# EAGLE board rcp2n64rgb (EAGLE 9.5.2)
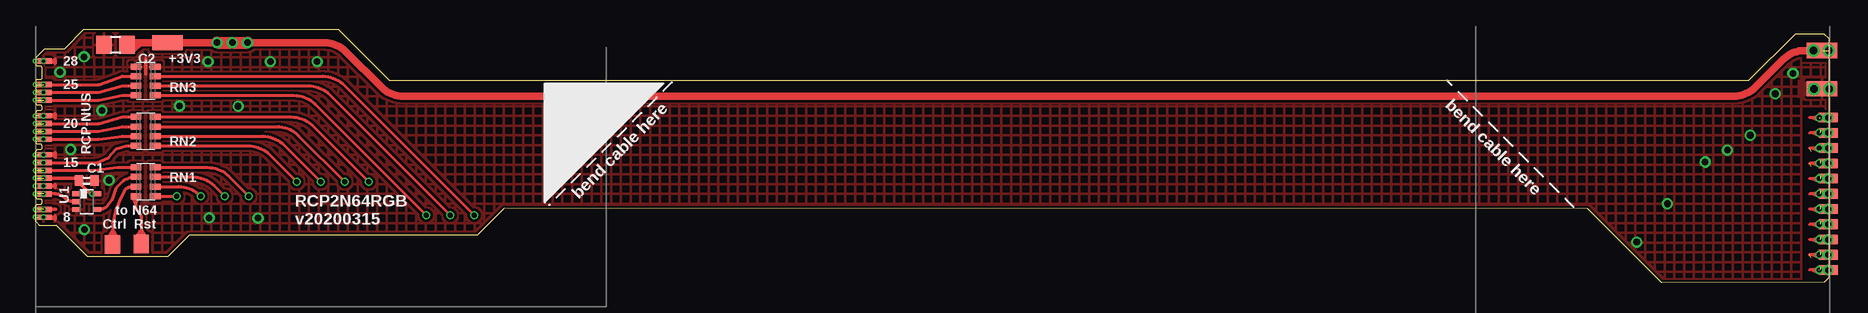
[diagram p0: board, top side]
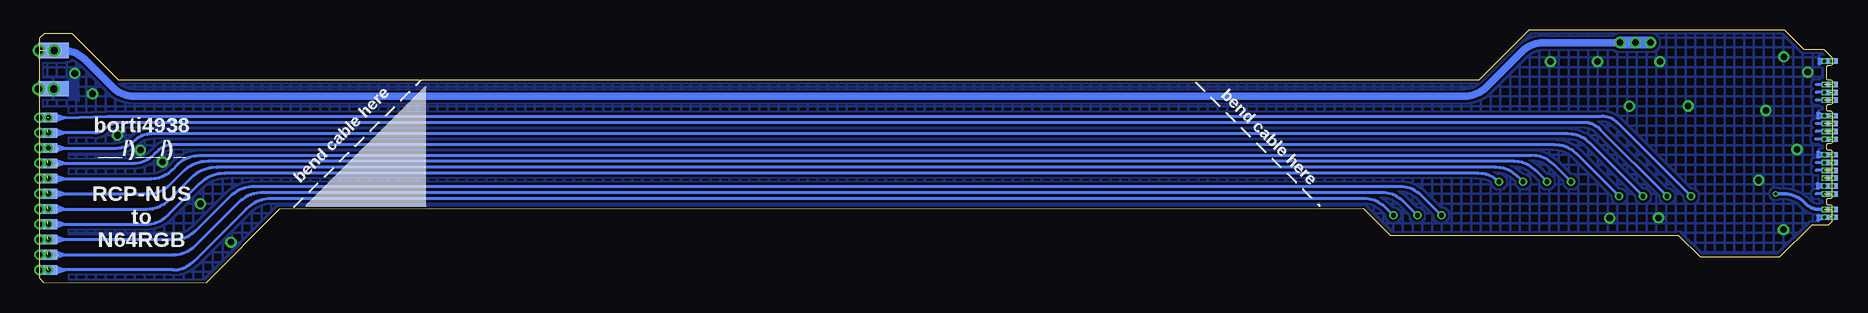
[diagram p1: board, bottom side, seen from below]

Size 149.4 x 21.05 mm. Coordinates in mm from the lower left corner, seen from the top.
Outline: 0,5.1 0.3,4.8 1.7,4.8 4.35,2.15 11,2.15 12.8,3.95 36.8,3.95 39.05,6.2 129.35,6.15 135.5,0 149.05,0.05 149.4,0.4 149.4,20.35 149,20.75 146.66,20.75 142.76,16.85 29.45,16.85 25.25,21.05 3.98,21.05 2.38,19.45 0.7,19.45 0,18.75 0,18.15 0.1,18.05 0.4,18.05 0.5,17.95 0.5,17 0.4,16.9 0.1,16.9 0,16.8 0,14.9 0.1,14.8 0.4,14.8 0.5,14.7 0.5,14.4 0.4,14.3 0.1,14.3 0,14.2 0,11.65 0.1,11.55 0.4,11.55 0.5,11.45 0.5,11.15 0.4,11.05 0.1,11.05 0,10.95 0,7.1 0.1,7 0.4,7 0.5,6.9 0.5,6.6 0.4,6.5 0.1,6.5 0,6.4 0,5.1
Copper layers (1*16): Top 0.018mm / dielectric 1.55mm / Bottom 0.018mm
Design rules "fpc": minimum track width 0.1mm, minimum drill 0.2mm, track to track 0.2mm, track to pad 0.2mm, pad to pad 0.2mm, via to via 0.2mm, smd to smd 0mil, copper to edge 0.2mm, drill to drill 0.2mm, minimum pad ring 0.125mm, minimum via ring 0.1mm, stop-mask expansion 2mil, vias tented up to drill 1mm, thermal gap 0.2mm
bKeepout: area 147.3,-0.6 to 149,14.5
tRestrict: area 147.3,18.4 to 150.1,20.7; area 147.3,-0.6 to 149,14.5
bRestrict: area 147.1,-0.6 to 149,14.5; area 147.3,18.4 to 150.1,20.7

## Footprints (pad centres in the part's own frame; a part is rotated, then mirrored left to right if it is on the bottom)
SMD0,8-1,6 = smd 0.8 x 1.6: P$1 0,0
C0402 = smd 0.7 x 0.9: 1 -0.65,0; 2 0.65,0
C0805 = smd 1.3 x 1.5: 1 -0.95,0; 2 0.95,0
SMD0,45-1,35 = smd 1.35 x 0.45: P$1 0,0
SMD0.8SQ = smd 1.27 x 1.524: P$1 0,0
SMD1,27-2,54 = smd 1.27 x 2.54: 1 0,0
CTS742C083 = smd 0.5 x 0.9: 1 -1.2,-0.8; 2 -0.4,-0.8; 3 0.4,-0.8; 4 1.2,-0.8; 5 1.2,0.8; 6 0.4,0.8; 7 -0.4,0.8; 8 -1.2,0.8
DCK_R-PDSO-G5 = smd 0.4 x 0.7: 1 -0.65,-0.85; 2 0,-0.85; 3 0.65,-0.85; 4 0.65,0.85; 5 -0.65,0.85

## Placement (x,y rotation side)
/RST_A  [SMD0,8-1,6]  148.72,13.75 270 bottom
/RST_A1  [SMD0,8-1,6]  149.37,13.75 270 top
C1  [C0402]  4.25,8.5 0 top
C2  22u  [C0805]  6.65,19.8 180 top
CLOCK#  [SMD0,8-1,6]  148.72,11.21 270 bottom
CLOCK#1  [SMD0,8-1,6]  149.37,11.21 270 top
CTRL_A  [SMD0,8-1,6]  148.72,12.48 270 bottom
CTRL_A1  [SMD0,8-1,6]  149.37,12.48 270 top
D0  [SMD0,8-1,6]  148.72,1.05 270 bottom
D1  [SMD0,8-1,6]  148.72,2.32 270 bottom
D2  [SMD0,8-1,6]  148.72,3.59 270 bottom
D3  [SMD0,8-1,6]  148.72,4.86 270 bottom
D4  [SMD0,8-1,6]  148.72,6.13 270 bottom
D5  [SMD0,8-1,6]  148.72,7.4 270 bottom
D6  [SMD0,8-1,6]  148.72,8.67 270 bottom
D7  [SMD0,8-1,6]  149.37,1.05 270 top
D8  [SMD0,8-1,6]  149.37,2.32 270 top
D9  [SMD0,8-1,6]  149.37,3.59 270 top
D10  [SMD0,8-1,6]  149.37,4.86 270 top
D11  [SMD0,8-1,6]  149.37,6.13 270 top
D12  [SMD0,8-1,6]  149.37,7.4 270 top
D13  [SMD0,8-1,6]  149.37,8.67 270 top
DSYNC#  [SMD0,8-1,6]  148.72,9.94 270 bottom
DSYNC#1  [SMD0,8-1,6]  149.37,9.94 270 top
E$1  [SMD0,45-1,35]  0.65,6.1 0 top
E$2  [SMD0.8SQ]  6.4,3.18 0 top
E$3  [SMD0,45-1,35]  0.2,6.1 0 bottom
E$4  [SMD0,45-1,35]  0.2,8.7 0 bottom
E$5  [SMD0,45-1,35]  0.65,8.7 0 top
E$6  [SMD0.8SQ]  8.8,3.23 0 top
E$8  [SMD0,45-1,35]  0.65,7.4 0 top
E$9  [SMD0,45-1,35]  0.65,8.05 0 top
E$10  [SMD0,45-1,35]  0.65,9.35 0 top
E$11  [SMD0,45-1,35]  0.65,10 0 top
E$12  [SMD0,45-1,35]  0.65,10.65 0 top
E$13  [SMD0,45-1,35]  0.65,11.95 0 top
E$14  [SMD0,45-1,35]  0.65,12.6 0 top
E$15  [SMD0,45-1,35]  0.65,13.25 0 top
E$16  [SMD0,45-1,35]  0.65,13.9 0 top
E$17  [SMD0,45-1,35]  0.65,15.2 0 top
E$18  [SMD0,45-1,35]  0.65,15.85 0 top
E$19  [SMD0,45-1,35]  0.65,16.5 0 top
E$22  [SMD0,45-1,35]  0.2,16.5 0 bottom
E$23  [SMD0,45-1,35]  0.2,15.85 0 bottom
E$24  [SMD0,45-1,35]  0.2,15.2 0 bottom
E$25  [SMD0,45-1,35]  0.2,13.9 0 bottom
E$26  [SMD0,45-1,35]  0.2,13.25 0 bottom
E$27  [SMD0,45-1,35]  0.2,12.6 0 bottom
E$28  [SMD0,45-1,35]  0.2,11.95 0 bottom
E$29  [SMD0,45-1,35]  0.2,10.65 0 bottom
E$30  [SMD0,45-1,35]  0.2,10 0 bottom
E$31  [SMD0,45-1,35]  0.2,9.35 0 bottom
E$32  [SMD0,45-1,35]  0.2,8.05 0 bottom
E$33  [SMD0,45-1,35]  0.2,7.4 0 bottom
E$43  [SMD0,45-1,35]  0.2,5.45 0 bottom
E$46  [SMD0,45-1,35]  0.65,18.45 0 top
E$47  [SMD0,45-1,35]  0.2,18.45 0 bottom
GND  [SMD0,45-1,35]  0.65,5.45 0 top
P_GND0  [SMD1,27-2,54]  148.21,16.16 90 bottom
P_GND1  [SMD1,27-2,54]  148.86,16.16 90 top
P_VCC_3V  [SMD1,27-2,54]  148.21,19.34 90 bottom
P_VCC_3V1  [SMD1,27-2,54]  148.86,19.34 90 top
P_VCC_3V3  [SMD1,27-2,54]  10.96,19.99 90 top
RN1  [CTS742C083]  9.15,8.4 270 top
RN2  [CTS742C083]  9.15,12.6 270 top
RN3  [CTS742C083]  9.15,16.8 270 top
U1  [DCK_R-PDSO-G5]  4.25,6.75 270 top

## Library data of the parts
/RST_A /RST_A1 CLOCK# CLOCK#1 CTRL_A CTRL_A1 D0 D1-D13 DSYNC# DSYNC#1 E$1-E$6 E$8-E$19 E$22-E$33 E$43 E$46 E$47 GND = wirepad
C1 C2 = rcl
P_GND0 P_GND1 P_VCC_3V P_VCC_3V1 P_VCC_3V3 = wirepad@1
RN1-RN3 = resistor-net
U1 = 74xx-little-de

## Nets
3V3: C2.1 P_VCC_3V1.1 P_VCC_3V3.1 P_VCC_3V.1
#DSYNC: E$10.P$1 E$31.P$1 RN1.1
#DSYNC.1: DSYNC#1.P$1 DSYNC#.P$1 RN1.8
CTRL: E$2.P$1 RN1.3
CTRL.1: CTRL_A1.P$1 CTRL_A.P$1 RN1.6
D0: E$19.P$1 E$22.P$1 RN3.2
D0.1: D0.P$1 D7.P$1 RN3.7
D1: E$18.P$1 E$23.P$1 RN3.3
D1.1: D1.P$1 D8.P$1 RN3.6
D2: E$17.P$1 E$24.P$1 RN3.4
D2.1: D2.P$1 D9.P$1 RN3.5
D3: E$15.P$1 E$26.P$1 RN2.1
D3.1: D3.P$1 D10.P$1 RN2.8
D4: E$14.P$1 E$27.P$1 RN2.2
D4.1: D4.P$1 D11.P$1 RN2.7
D5: E$13.P$1 E$28.P$1 RN2.3
D5.1: D5.P$1 D12.P$1 RN2.6
D6: E$11.P$1 E$30.P$1 RN2.4
D6.1: D6.P$1 D13.P$1 RN2.5
GND: C1.2 C2.2 E$9.P$1 E$12.P$1 E$16.P$1 E$25.P$1 E$29.P$1 E$32.P$1 E$43.P$1 E$46.P$1 GND.P$1 P_GND0.1 P_GND1.1 RN3.1 RN3.8 U1.3
RST: E$6.P$1 RN1.4
RST.1: /RST_A1.P$1 /RST_A.P$1 RN1.5
VCC: C1.1 E$1.P$1 E$3.P$1 E$4.P$1 E$5.P$1 U1.5
VCLK: E$8.P$1 E$33.P$1 U1.2
VCLK.1: CLOCK#1.P$1 CLOCK#.P$1 RN1.7
VCLK_BUF: RN1.2 U1.4

## Tracks (layer width: path | path; a pad name or v marks a point on that pad's centre or on a via)
3V3  (via drill 0.55, 0.6)  (1 unrouted)
  Top 0.203: P_VCC_3V1.1 v148.14,19.34
  Top 0.254: C2.1 7.65,19.8 8.05,19.4
  Top 0.61: P_VCC_3V1.1 147.41,19.34 arc45 145.61,18.59 143.29,16.27 arc-45 141.49,15.53 30.63,15.53 arc-45 28.83,16.27 25.85,19.25 arc45 24.06,19.99 v17.66,19.99 | v15.12,19.99 P_VCC_3V3.1 7.79,19.99 C2.1 | 8.05,19.4 8.65,20
  Top 1.016: v15.12,19.99 v17.66,19.99
  Bottom 0.127: v16.39,19.99 v17.66,19.99
  Bottom 0.61: P_VCC_3V1.1 P_VCC_3V.1 147.41,19.34 arc45 145.61,18.59 143.29,16.27 arc-45 141.49,15.53 30.63,15.53 arc-45 28.83,16.27 25.85,19.25 arc45 24.06,19.99 v17.66,19.99
  Bottom 1.016: v15.12,19.99 v17.66,19.99
  other vias: 149.41,19.34
#DSYNC  (via drill 0.25)  (2 unrouted)
  Top 0.254: E$10.P$1 4.85,9.35 6.8,9.6 RN1.1
  Bottom 0.254: E$31.P$1 1.34,9.35
  other vias: 0.65,9.35 0,9.35
#DSYNC.1  (via drill 0.4, 0.5)  (3 unrouted)
  Top 0.254: RN1.8 14.3,9.6 arc-45 16.09,8.86 v17.75,7.2 | DSYNC#1.P$1 147.83,9.94 | 148.72,10.19 148.08,9.94 148.72,9.69
  Bottom 0.152: DSYNC#.P$1 148.23,9.94 147.98,10.19
  Bottom 0.203: v148.63,9.94 148.63,10.19 147.86,9.94 148.63,9.69 148.72,9.69 DSYNC#.P$1 DSYNC#1.P$1 | 147.98,9.69 147.21,9.94 147.98,10.19
  Bottom 0.254: v17.75,7.2 21.28,10.73 arc-45 23.07,11.47 138.36,11.47 arc-45 139.5,11 139.81,10.69 arc45 141.61,9.94 DSYNC#1.P$1
  other vias: 149.39,9.94
CTRL
  Top 0.254: E$2.P$1 6.4,4.38 | 6.4,4.38 5.9,3.58 | 6.4,4.38 6.9,3.58 | 8.2,8 RN1.3 8.12,8 arc45 7.4,7.7 7.05,7 6.66,6.03 6.4,4.94 6.4,4.38
CTRL.1  (via drill 0.4, 0.5)  (2 unrouted)
  Top 0.203: v149.39,12.48 CTRL_A1.P$1 v148.63,12.48
  Top 0.254: RN1.6 11.9,8 arc-45 13.69,7.26 v13.75,7.2 | CTRL_A1.P$1 147.83,12.48 | 148.72,12.73 148.08,12.48 148.72,12.23
  Bottom 0.152: 147.98,12.73 148.37,12.73 v148.63,12.48
  Bottom 0.203: v148.63,12.48 148.63,12.73 147.86,12.48 148.63,12.23 148.72,12.23 CTRL_A.P$1 | 147.98,12.23 147.21,12.48 147.98,12.73
  Bottom 0.254: v13.75,7.2 19.34,12.79 arc-45 20.66,13.33 142.72,13.33 arc-45 143.93,12.84 143.95,12.81 arc45 144.75,12.48 v148.63,12.48
  Bottom 0.406: CTRL_A.P$1 149,12.48
D0  (via drill 0.25)  (2 unrouted)
  Top 0.254: E$19.P$1 5.25,16.5 7.2,17.2 RN3.2
  Bottom 0.254: E$22.P$1 1.34,16.5
  other vias: 0.65,16.5 0,16.5
D0.1  (via drill 0.4, 0.5)  (3 unrouted)
  Top 0.203: D7.P$1 v148.63,1.05
  Top 0.254: RN3.7 23.9,17.2 arc-45 25.69,16.46 v36.55,5.6 | D7.P$1 147.83,1.05 | 148.72,1.3 148.08,1.05 148.72,0.8
  Bottom 0.152: D0.P$1 148.23,1.05 147.98,1.3
  Bottom 0.203: v148.63,1.05 148.63,1.3 147.86,1.05 148.63,0.8 148.72,0.8 D0.P$1 | 147.98,1.3 147.21,1.05 147.98,0.8
  Bottom 0.254: v36.55,5.6 37.21,6.26 arc-45 39,7 130.05,7 arc-45 132.15,6.13 136.49,1.79 arc45 138.28,1.05 v148.63,1.05
  other vias: 149.39,1.05
D1  (via drill 0.25)  (1 unrouted)
  Top 0.254: E$18.P$1 5.25,15.85 7.2,16.4 RN3.3
  Bottom 0.127: E$23.P$1 E$18.P$1
  Bottom 0.254: E$23.P$1 1.34,15.85
  other vias: 0.65,15.85 0,15.85
D1.1  (via drill 0.4, 0.4 pad 0.55, 0.5)  (3 unrouted)
  Top 0.254: RN3.6 22.7,16.4 arc-45 24.49,15.66 v34.55,5.6 | D8.P$1 147.83,2.32 | 148.72,2.57 148.08,2.32 148.72,2.07
  Bottom 0.152: D1.P$1 148.21,2.32 147.96,2.57
  Bottom 0.203: v148.63,2.32 | v148.63,2.32 148.63,2.57 147.86,2.32 148.63,2.07 148.72,2.07 D1.P$1 | 149.02,2.32 v148.63,2.32 | 147.98,2.57 147.96,2.57 147.21,2.32 147.98,2.07
  Bottom 0.254: v34.55,5.6 35.71,6.76 arc-45 37.5,7.5 130.75,7.5 arc-45 132.85,6.63 136.41,3.07 arc45 138.21,2.32 v148.63,2.32
  other vias: 149.39,2.32
D2  (via drill 0.25)  (2 unrouted)
  Top 0.254: E$17.P$1 5.25,15.2 7.2,15.6 RN3.4
  Bottom 0.254: E$24.P$1 1.35,15.2
  other vias: 0.65,15.2 0,15.2
D2.1  (via drill 0.4, 0.5)  (3 unrouted)
  Top 0.203: D9.P$1 v148.63,3.59
  Top 0.254: v32.55,5.6 23.29,14.86 arc45 21.5,15.6 RN3.5 | D9.P$1 147.83,3.59 | 148.72,3.84 148.08,3.59 148.72,3.34
  Bottom 0.152: D2.P$1 v149.39,3.59
  Bottom 0.203: v148.63,3.59 148.63,3.84 147.86,3.59 148.48,3.38 147.83,3.38 | 147.83,3.38 147.21,3.59 147.98,3.84 | 147.83,3.38 147.98,3.34
  Bottom 0.254: v32.55,5.6 34.21,7.26 arc-45 36,8 131.45,8 arc-45 133.55,7.13 136.34,4.34 arc45 138.14,3.59 v148.63,3.59
D3  (via drill 0.25)  (2 unrouted)
  Top 0.254: E$15.P$1 5.25,13.25 7.2,13.8 RN2.1
  Bottom 0.254: E$26.P$1 1.35,13.25
  other vias: 0.65,13.25 0,13.25
D3.1  (via drill 0.4, 0.5)  (3 unrouted)
  Top 0.203: D10.P$1 v148.63,4.86
  Top 0.254: RN2.8 21.3,13.8 arc-45 23.09,13.06 v27.75,8.4 | D10.P$1 147.83,4.86 | 148.72,5.11 148.08,4.86 148.72,4.61
  Bottom 0.152: D3.P$1 148.23,4.86 147.98,5.11
  Bottom 0.203: v148.63,4.86 148.63,5.11 147.86,4.86 148.63,4.61 148.72,4.61 D3.P$1 | 147.98,5.11 147.21,4.86 147.98,4.61
  Bottom 0.254: v27.75,8.4 arc-45 29.44,9.1 133.95,9.1 arc-45 136.05,8.23 138.68,5.61 arc45 140.47,4.86 v148.63,4.86
  other vias: 149.39,4.86
D4  (via drill 0.25)  (2 unrouted)
  Top 0.254: E$14.P$1 5.25,12.6 7.2,13 RN2.2
  Bottom 0.254: E$27.P$1 1.34,12.6
  other vias: 0.65,12.6 0,12.6
D4.1  (via drill 0.4, 0.5)  (3 unrouted)
  Top 0.203: D11.P$1 v148.63,6.13
  Top 0.254: 149.34,6.15 arc45 D11.P$1 147.83,6.13 | RN2.7 20.1,13 arc-45 21.89,12.26 v25.75,8.4 | 148.72,6.38 148.08,6.13 148.72,5.88
  Bottom 0.152: D4.P$1 148.23,6.13 147.98,6.38
  Bottom 0.203: v148.63,6.13 148.63,6.38 147.86,6.13 148.63,5.88 148.72,5.88 D4.P$1 | 147.98,6.38 147.21,6.13 147.98,5.88
  Bottom 0.254: v25.75,8.4 26.21,8.86 arc-45 28,9.6 134.65,9.6 arc-45 136.75,8.73 138.6,6.88 arc45 140.4,6.13 v148.63,6.13
  other vias: 149.39,6.13
D5  (via drill 0.25)  (1 unrouted)
  Top 0.254: E$13.P$1 5.25,11.95 7.2,12.2 RN2.3
  Bottom 0.127: E$28.P$1 E$13.P$1
  Bottom 0.254: E$28.P$1 1.36,11.95
  other vias: 0.65,11.95 0,11.95
D5.1  (via drill 0.4, 0.5)  (3 unrouted)
  Top 0.203: D12.P$1 v148.63,7.4
  Top 0.254: RN2.6 18.9,12.2 arc-45 20.69,11.46 v23.75,8.4 | D12.P$1 147.83,7.4 | 148.72,7.65 148.08,7.4 148.72,7.15
  Bottom 0.152: D5.P$1 148.23,7.4 147.98,7.15
  Bottom 0.203: v148.63,7.4 148.63,7.65 147.86,7.4 148.63,7.15 148.72,7.15 D5.P$1 | 147.98,7.15 147.21,7.4 147.98,7.65
  Bottom 0.254: v23.75,8.4 24.71,9.36 arc-45 26.5,10.1 135.35,10.1 arc-45 137.45,9.23 138.53,8.14 arc45 140.33,7.4 v148.63,7.4
  other vias: 149.39,7.4
D6  (via drill 0.25)  (1 unrouted)
  Top 0.254: E$11.P$1 5.1,10 6.05,10.4 6.7,11.15 7.55,11.4 RN2.4
  Bottom 0.127: E$30.P$1 E$11.P$1
  Bottom 0.254: E$30.P$1 1.35,10
  other vias: 0.65,10 0,10
D6.1  (via drill 0.4, 0.5)  (2 unrouted)
  Top 0.203: D13.P$1 v148.63,8.67
  Top 0.254: v21.75,8.4 19.49,10.66 arc45 17.7,11.4 RN2.5 | D13.P$1 147.83,8.67 | 148.72,8.92 148.08,8.67 148.72,8.42
  Bottom 0.152: v148.63,8.67 D6.P$1 148.23,8.67 147.98,8.92
  Bottom 0.203: v148.63,8.67 148.63,8.92 147.86,8.67 148.63,8.42 148.72,8.42 D6.P$1 | 147.98,8.92 147.21,8.67 147.98,8.42
  Bottom 0.254: v21.75,8.4 23.21,9.86 arc-45 25,10.6 136.05,10.6 arc-45 137.84,9.86 138.28,9.42 arc45 140.08,8.67 D6.P$1 D13.P$1
  other vias: 149.39,8.67
GND  (via drill 0.25, 0.55, 0.6)  (3 unrouted)
  Top 0.203: P_GND1.1 v148.19,16.14
  Top 0.254: E$46.P$1 0.33,18.45 | v0,8.05 E$9.P$1 0.33,8.05 | 1.23,8.03 1.28,8.05 | 1.28,8.05 1.62,8.21 1.62,7.9 1.28,8.05 | 1.18,18.45 1.62,18.65 1.62,18.24 1.18,18.45 | 1.23,5.41 1.62,5.59 1.62,5.23 1.23,5.41 | 1.2,10.64 1.65,10.85 1.65,10.44 1.2,10.64 | 1.17,13.9 1.62,14.1 1.62,13.69 1.17,13.9
  Top 0.305: 9.15,17.41 9.15,18.65
  Bottom 0.127: E$25.P$1 E$16.P$1
  Bottom 0.254: 0.7,8.05 1.25,7.86 1.25,8.25 E$9.P$1 | E$12.P$1 1.2,10.9 1.2,10.46 E$12.P$1 | E$16.P$1 1.2,14.15 1.2,13.71 E$16.P$1 | 1.2,5.6 1.2,5.2 GND.P$1 1.2,5.6 | E$46.P$1 1.07,18.64 1.07,18.26 E$46.P$1
  Bottom 0.305: v0,18.45 E$46.P$1
  other vias: 0,13.9 0.65,13.9 0.65,18.45 4.05,4.41 0,5.45 0.65,5.45 0.65,8.05 0.65,10.65 0,10.65 149.46,16.14 14.35,18.41 2.03,17.54 11.99,14.72 16.87,14.7 5.51,14.34 2.91,11.09 6.11,8.53 14.46,5.4 18.52,5.37 146.44,17.44 144.96,15.74 135.97,6.57 139.12,10.05 140.97,11.04 142.88,12.28 4.02,18.81 19.55,18.41 23.45,18.41 133.42,3.37
  pour Bottom (hatched): 0,1.69 133,1.69 135.54,-0.86 149.26,-0.86 149.26,21.37 0,21.37
  pour Top (hatched): 0,1.69 133,1.69 135.54,-0.86 149.26,-0.86 149.26,21.37 0,21.37
  pour Top (no thermals): 148.22,16.14 147,16.8 147,15.53
  pour Bottom (no thermals): 148.12,16.14 146.22,17.17 146.27,16.57 146.22,15.19
RST
  Top 0.254: 8.8,4.43 E$6.P$1 | 8.8,4.43 9.3,3.58 | 8.8,4.43 8.76,4.35 8.3,3.58 | 8.35,6.58 8.3,6.69 8.1,7.18 | 8.35,6.58 8.6,7.18 | 8.35,6.58 8.35,6.3 arc45 8.49,5.96 8.6,5.85 arc-45 8.8,5.37 8.8,4.43 | RN1.4 8.35,6.58
RST.1  (via drill 0.4, 0.5)  (1 unrouted)
  Top 0.127: /RST_A1.P$1
  Top 0.203: /RST_A1.P$1 149.02,13.75
  Top 0.254: RN1.5 v11.75,7.2 | /RST_A1.P$1 v148.63,13.75 148.08,13.75 | 148.08,13.75 147.83,13.75 | 148.08,13.75 148.72,14 | 148.08,13.75 148.72,13.5
  Bottom 0.127: /RST_A1.P$1 149.02,13.75
  Bottom 0.203: v148.63,13.75 148.63,14 147.86,13.75 148.63,13.5 | 149.02,13.75 | 149.02,13.75 v148.63,13.75 | 147.98,14 147.21,13.75 147.98,13.5 148.63,13.5 | 148.63,13.5 v148.63,13.75
  Bottom 0.254: v11.75,7.2 17.86,13.31 arc-45 19.17,13.85 143.72,13.85 147.21,13.75 v149.39,13.75
VCC  (via drill 0.25)  (4 unrouted)
  Top 0.305: E$5.P$1 3.6,8.7 C1.1 arc45 3.71,8.24 4.44,7.51 arc45 v4.7,7.4 U1.5 | E$1.P$1 1.65,6.1
  Bottom 0.305: E$3.P$1 1.13,6.1 arc45 2.1,6.5 2.26,6.66 arc-45 4.05,7.4 v4.7,7.4
  other vias: 0.65,6.1 0,6.1 0.65,8.7 0,8.7
VCLK  (via drill 0.25)  (2 unrouted)
  Top 0.254: U1.2 3.12,6.75 arc-45 2.4,7.05 arc45 1.55,7.4 E$8.P$1
  Bottom 0.254: E$33.P$1 1.35,7.4
  other vias: 0.65,7.4 0,7.4
VCLK.1  (via drill 0.4, 0.5)  (4 unrouted)
  Top 0.203: CLOCK#1.P$1 v148.63,11.21
  Top 0.254: RN1.7 13.1,8.8 arc-45 14.89,8.06 v15.75,7.2 | CLOCK#1.P$1 147.83,11.21 | 148.72,11.46 148.08,11.21 148.72,10.96
  Bottom 0.203: v148.63,11.21 148.63,11.46 147.86,11.21 148.43,11.02 | 148.43,11.02 148.63,10.96 | 147.98,10.96 147.21,11.21 147.98,11.46 | CLOCK#.P$1 148.72,11.02 148.43,11.02
  Bottom 0.254: v15.75,7.2 20.2,11.65 arc-45 21.99,12.39 140.07,12.39 arc-45 141.5,11.8 141.5,11.8 arc45 142.92,11.21 v148.63,11.21
  other vias: 149.39,11.21
VCLK_BUF
  Top 0.254: RN1.2 arc45 7.07,8.27 6.92,8.12 6.69,7.84 6.34,6.87 5.95,6.35 arc-45 5.35,6.1 U1.4

## Text on the board
tPlace: 28 | +3V3 | 25 | RN3 | bend cable here | RCP-NUS | 20 | RN2 | 15 | RN1 | bend cable here | 8 | to N64 | Ctrl | Rst
bPlace: bend cable here | bend cable here
tNames: RCP2N64RGB / v20200315
bNames: borti4938 / __/)__/)_ / / RCP-NUS / to / N64RGB